# Altium PCB ctrl_board.PcbDoc
Units mm, origin at the board's own origin, x right, y up, seen from the top; angles counter-clockwise.
Board outline 140 x 82 mm, 2 copper layers (Top Layer, Bottom Layer); 140 components, 74 nets, 391 pads, 0 vias.
Unrouted connection lines stored in the file: 255.
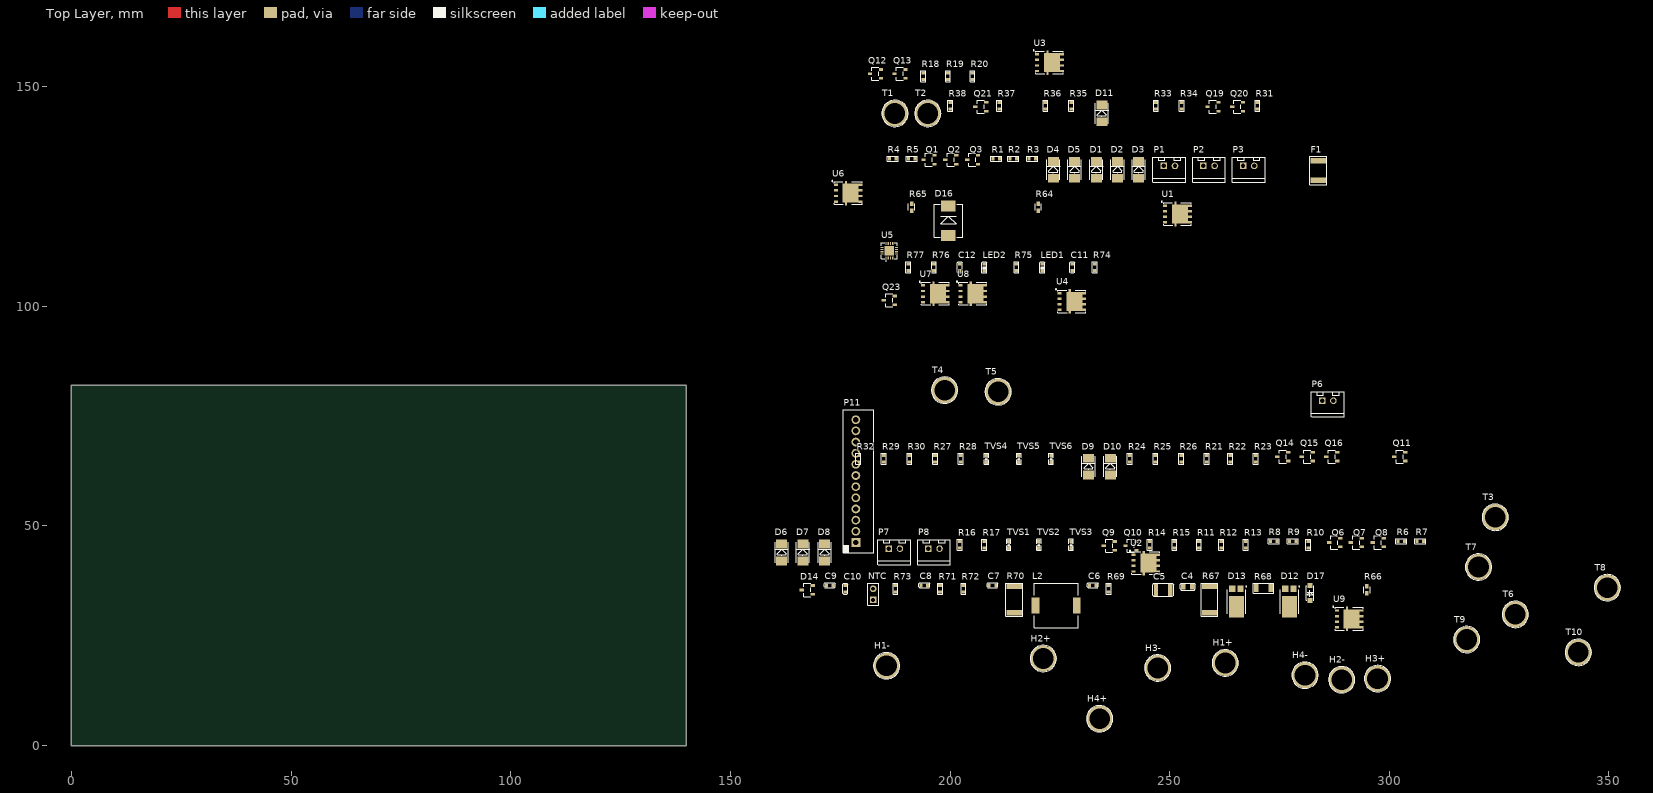
[diagram p0: Top Layer view]
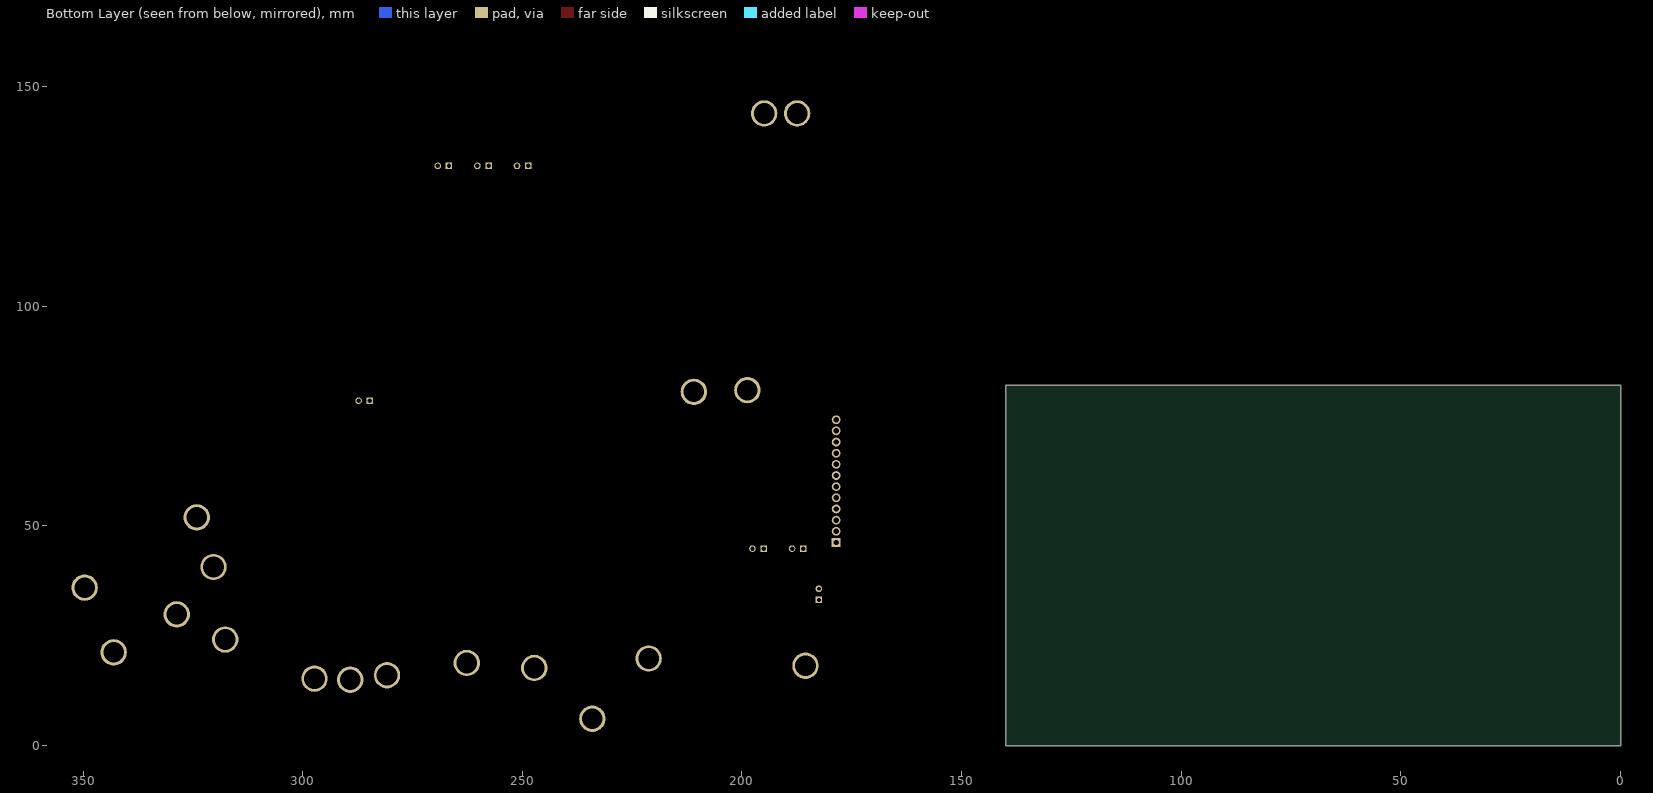
[diagram p1: Bottom Layer view, seen from below]

## Layer stack, top to bottom
Top Solder: solder mask 0.0102, Solder Resist, Dk 3.5
Top Layer: signal copper 0.0356
Dielectric1: dielectric 0.32, FR-4, Dk 4.8
Bottom Layer: signal copper 0.0356
Bottom Solder: solder mask 0.0102, Solder Resist, Dk 3.5

## Board outline
0,0 140,0 140,82 0,82

## Design rules (kind name [scope] priority, off if disabled: settings)
Clearance [All] p1: gap=0.254 ignorepadtopadclearanceinfootprint=FALSE except(0: Arc-Hole Track-Hole SMDPad-Hole THPad-Hole Via-Hole Fill-Hole Poly-Hole Region-Hole Text-Hole)
PolygonConnect [All] p1: connectstyle=Relief reliefconductorwidth=0.254 reliefentries=4 polygonreliefangle="90 Angle" airgapwidth=0.254
RoutingVias [All] p1: holewidth=0.711 width=1.27 viastyle="Through Hole" minholewidth=0.711 minwidth=1.27 maxholewidth=0.711 maxwidth=1.27
SilkToSolderMaskClearance SilkscreenOverComponentPads [IsPad] p1: minsilkscreentomaskgap=0.254 clearancetoexposedcopper=TRUE
SolderMaskExpansion [All] p1: expansion=0.102 istentingtop=FALSE
Width [All] p1: maxlimit=0.254 minlimit=0.254 preferedwidth=0.254
29 further rules are at their usual default settings.

## Classes and differential pairs
component class charger: C4 C5 C6 C7 C8 C9 C10 C11 C12 D12 D13 D14 D16 D17 L2 LED1 LED2 NTC Q23 R64 R65 R66 R67 R68 R69 R70 R71 R72 R73 R74 R75 R76 R77 T3 T4 T5 T6 T7 T8 T9 T10 U1 U2 U4 U5
component class drv: D1 D2 D3 D4 D5 D6 D7 D8 D9 D10 D11 F1 H1+ H1- H2+ H2- H3+ H3- H4+ H4- P1 P2 P3 P6 P7 P8 P11 Q1 Q2 Q3 Q6 Q7 Q8 Q9 Q10 Q11 Q12 Q13 Q14 Q15 Q16 Q19 Q20 Q21 R1 R2 R3 R4 R5 R6 R7 R8 R9 R10 R11 R12 R13 R14 R15 R16 R17 R18 R19 R20 R21 R22 R23 R24 R25 R26 R27 R28 R29 R30 R31 R32 R33 R34 R35 R36 R37 R38 T1 T2 TVS1 TVS2 TVS3 TVS4 TVS5 TVS6 U3 U6 U7 U8 U9

## Components (designator, comment, footprint, x,y, rotation, side; value= is the part's Value field where it differs from the comment)
C4 "1uF/25V" 0805C 253.111,36.195 r0 top
C5 "2.2uF/25V" 1210C 246.888,35.433 r0 top
C6 "1uF/25V" 0603C 231.775,36.449 r0 top
C7 "1uF/25V" 0603C 208.915,36.449 r0 top
C8 "10uF/25V" 0603C 193.421,36.449 r0 top
C9 "22pF" 0603C 171.831,36.449 r0 top
C10 "10uF/25V" 0603C 176.149,34.925 r90 top
C11 "0.1uF/25V" 0603C 227.838,108.077 r90 top
C12 "0.1uF/25V" 0603C 202.184,108.077 r90 top
D1 "1N4007" DO-214-AC 233.299,131.064 r90 top
D2 "1N4007" DO-214-AC 238.125,131.064 r90 top
D3 "1N4007" DO-214-AC 242.951,131.064 r90 top
D4 "1N4007" DO-214-AC 223.52,131.064 r90 top
D5 "1N4007" DO-214-AC 228.346,131.064 r90 top
D6 "1N4007" DO-214-AC 161.671,43.942 r90 top
D7 "1N4007" DO-214-AC 166.497,43.942 r90 top
D8 "1N4007" DO-214-AC 171.45,43.942 r90 top
D9 "1N4007" DO-214-AC 231.521,63.5 r90 top
D10 "1N4007" DO-214-AC 236.474,63.5 r90 top
D11 "1N4007" DO-214-AC 234.569,143.891 r90 top
D12 "PDS1040-13" POWERDI-5_L5.4-W4.0-LS6.5-RD 277.241,33.655 r90 top
D13 "PDS1040-13" POWERDI-5_L5.4-W4.0-LS6.5-RD 265.176,33.655 r90 top
D14 "bat54c" sot23-3 168.783,34.417 r0 top
D16 "SMCJ28CA" SMC 199.644,116.078 r90 top
D17 "BZT52C27" sod123 281.94,33.02 r90 top value=BZT52C12S-7-F
F1 "2A" 1812-F 283.845,128.651 r90 top
H1+ "12V" FIX-4.5 262.636,18.796 r0 top
H1- "12V" FIX-4.5 185.547,18.161 r0 top
H2+ "12V" FIX-4.5 221.234,19.812 r0 top
H2- "12V" FIX-4.5 289.179,14.986 r0 top
H3+ "12V" FIX-4.5 297.307,15.24 r0 top
H3- "12V" FIX-4.5 247.269,17.653 r0 top
H4+ "12V" FIX-4.5 234.061,6.096 r0 top
H4- "12V" FIX-4.5 280.797,16.002 r0 top
L2 "SMMS1040-3R3M" MSS1038 219.456,31.877 r0 top
LED1 "5V" 0603LED 220.98,108.077 r90 top
LED2 "5V" 0603LED 207.772,108.077 r90 top
NTC "Header 2" HDR1X2 182.499,33.147 r90 top
P1 "SIP-2" SIP-2A 249.936,131.953 r0 top
P2 "SIP-2" SIP-2A 258.953,131.953 r0 top
P3 "SIP-2" SIP-2A 267.97,131.953 r0 top
P6 "SIP-2" SIP-2A 286.004,78.486 r0 top
P7 "SIP-2" SIP-2A 187.325,44.831 r0 top
P8 "SIP-2" SIP-2A 196.342,44.831 r0 top
P11 "Header 11" 12*2.54MMZ 175.641,48.133 r90 top
Q1 "BC817-16" SOT23-3 196.469,132.334 r0 top
Q2 "BC817-16" SOT23-3 201.422,132.334 r0 top
Q3 "BC817-16" SOT23-3 206.375,132.334 r0 top
Q6 "AO3400" SOT23-3 288.798,45.212 r0 top
Q7 "AO3400" SOT23-3 293.751,45.212 r0 top
Q8 "AO3400" SOT23-3 298.704,45.212 r0 top
Q9 "S8050" SOT23-3 237.49,44.45 r0 top
Q10 "S8050" SOT23-3 242.443,44.45 r0 top
Q11 "BC817-16" SOT23-3 303.657,64.77 r0 top
Q12 "BC817-16" SOT23-3 184.277,151.892 r0 top
Q13 "BC817-16" SOT23-3 189.865,151.892 r0 top
Q14 "AO3400" SOT23-3 276.987,64.77 r0 top
Q15 "AO3400" SOT23-3 282.575,64.77 r0 top
Q16 "AO3400" SOT23-3 288.163,64.77 r0 top
Q19 "S8050" SOT23-3 261.112,144.399 r0 top
Q20 "S8050" SOT23-3 266.7,144.399 r0 top
Q21 "S8050" SOT23-3 208.28,144.399 r0 top
Q23 "MMBT4403-7-F" SOT23-3 187.452,100.33 r0 top
R1 "100R" 0603R 209.804,133.604 r0 top
R2 "100R" 0603R 213.614,133.604 r0 top
R3 "100R" 0603R 217.932,133.604 r0 top
R4 "10K" 0603R 186.182,133.604 r0 top
R5 "10K" 0603R 190.5,133.604 r0 top
R6 "100" 0603R 302.006,46.482 r0 top
R7 "100" 0603R 306.324,46.482 r0 top
R8 "10K" 0603R 272.923,46.482 r0 top
R9 "10K" 0603R 277.241,46.482 r0 top
R10 "10K" 0603R 281.559,44.958 r90 top
R11 "10K" 0603R 256.667,44.958 r90 top
R12 "10K" 0603R 261.747,44.958 r90 top
R13 "10K" 0603R 267.335,44.958 r90 top
R14 "1K" 0603R 245.491,44.958 r90 top
R15 "1K" 0603R 251.079,44.958 r90 top
R16 "1K" 0603R 202.184,44.958 r90 top
R17 "1K" 0603R 207.772,44.958 r90 top
R18 "100R" 0603R 193.929,151.638 r90 top
R19 "100R" 0603R 199.517,151.638 r90 top
R20 "100R" 0603R 205.105,151.638 r90 top
R21 "10K" 0603R 258.445,64.516 r90 top
R22 "10K" 0603R 263.779,64.516 r90 top
R23 "10K" 0603R 269.621,64.516 r90 top
R24 "10K" 0603R 240.919,64.516 r90 top
R25 "10K" 0603R 246.761,64.516 r90 top
R26 "10K" 0603R 252.603,64.516 r90 top
R27 "10K" 0603R 196.596,64.516 r90 top
R28 "10K" 0603R 202.438,64.516 r90 top
R29 "100" 0603R 184.912,64.516 r90 top
R30 "100" 0603R 190.754,64.516 r90 top
R31 "1K" 0603R 270.002,144.907 r90 top
R32 "1K" 0603R 179.07,64.516 r90 top
R33 "1K" 0603R 246.888,144.907 r90 top
R34 "1K" 0603R 252.73,144.907 r90 top
R35 "10K" 0603R 227.584,144.907 r90 top
R36 "100" 0603R 221.742,144.907 r90 top
R37 "1K" 0603R 211.201,144.907 r90 top
R38 "10K" 0603R 200.025,144.907 r90 top
R64 "100k" RESC1608X055N_0603 220.091,122.555 r90 top
R65 "1k/1%" RESC1608X055N_0603 191.262,122.555 r90 top
R66 "10k" RESC1608X055N_0603 294.894,35.433 r90 top
R67 "2/1W" 2512R 259.08,30.226 r90 top
R68 "10/1/4W" 1206R 269.748,35.814 r0 top
R69 "215k" 0603R 236.093,34.925 r90 top
R70 "15mR" 2512R 214.63,30.226 r90 top
R71 "5.23K" 0603R 197.739,34.925 r90 top
R72 "11.8K" 0603R 203.073,34.925 r90 top
R73 "698K" 0603R 187.579,34.925 r90 top
R74 "30.1K" 0603R 232.918,108.077 r90 top
R75 "1k/1%" 0603R 215.138,108.077 r90 top
R76 "100K" 0603R 196.342,108.077 r90 top
R77 "1k/1%" 0603R 190.5,108.077 r90 top
T1 "12V" FIX-4.5 187.452,143.891 r0 top
T2 "12V-" FIX-4.5 194.945,143.891 r0 top
T3 "12V" FIX-4.5 324.104,51.943 r0 top
T4 "12V" FIX-4.5 198.755,80.899 r0 top
T5 "GND" FIX-4.5 210.947,80.518 r0 top
T6 "GND" FIX-4.5 328.676,29.845 r0 top
T7 "12V" FIX-4.5 320.294,40.64 r0 top
T8 "GND" FIX-4.5 349.631,35.941 r0 top
T9 "12V" FIX-4.5 317.627,24.13 r0 top
T10 "GND" FIX-4.5 343.027,21.209 r0 top
TVS1 "ESD5Z5.0CT1G" SOD-523 213.36,45.72 r90 top
TVS2 "ESD5Z5.0CT1G" SOD-523 220.218,45.72 r90 top
TVS3 "ESD5Z5.0CT1G" SOD-523 227.584,45.72 r90 top
TVS4 "ESD5Z5.0CT1G" SOD-523 208.28,65.278 r90 top
TVS5 "ESD5Z5.0CT1G" SOD-523 215.646,65.278 r90 top
TVS6 "ESD5Z5.0CT1G" SOD-523 223.012,65.278 r90 top
U1 "Si7997DP" "PowerPAK SO-8" 248.031,123.571 r0 top
U2 "Si7288DP" "PowerPAK SO-8" 240.812,44.099 r0 top
U3 "Si7997DP" "PowerPAK SO-8" 218.887,158.023 r0 top
U4 "Si7288DP" "PowerPAK SO-8" 223.967,103.667 r0 top
U5 "BQ24650RVAR" VQFN-16_L3.6-W3.6-P0.50-BL-EP 186.182,112.649 r0 top
U6 "Si7997DP" "PowerPAK SO-8" 173.04,128.305 r0 top
U7 "Si7997DP" "PowerPAK SO-8" 192.913,105.41 r0 top
U8 "Si7997DP" "PowerPAK SO-8" 201.422,105.41 r0 top
U9 "Si7997DP" "PowerPAK SO-8" 287.086,31.404 r0 top

## Footprints (in the part's own frame and the unit in brackets; to place one, negate y for a bottom-side part, rotate by r counter-clockwise, add the part's x,y. Pads: shape width x height; smd on the part's side, far side on the other; paste and mask are expansions set on the pad)
12*2.54MMZ [mm]
  rect 2x2 hole 1.2: 1(-1.905,-2.921)
  round 2 hole 1.2: 2(0.635,-2.921) 3(3.175,-2.921) 4(5.715,-2.921) 5(8.255,-2.921) 6(10.795,-2.921) 7(13.335,-2.921) 8(15.875,-2.921) 9(18.415,-2.921) 10(20.955,-2.921) 11(23.495,-2.921) 12(26.035,-2.921)
  silkscreen extent -4.23,-7 28.35,-0.02
0603C [mm]
  rect 0.7x0.85 smd: 1(0,0) 2(1.5,0)
  silkscreen extent -0.5,-0.55 2,0.55
0603LED [mm]
  rect 0.7x0.85 smd: 1(0,0) 2(1.5,0)
  silkscreen extent -0.5,-0.55 2,0.55
0603R [mm]
  rect 0.7x0.85 smd: 1(0,0) 2(1.5,0)
  silkscreen extent -0.5,-0.55 2,0.55
0805C [mm]
  rect 1x1.3 smd: 1(0,0) 2(2,0)
  silkscreen extent -0.7,-0.8 2.7,0.8
1206R [mm]
  rect 1x1.8 smd: 1(0,0) 2(3.25,0)
  silkscreen extent -0.7,-1.1 3.95,1.1
1210C [mm]
  rect 1x2.7 smd: 1(0,0) 2(3.25,0)
  silkscreen extent -0.8,-1.5 4.05,1.5
1812-F [mm]
  rect 1.3x3.5 smd: 1(0,0) 2(4.5,0)
  silkscreen extent -1,-1.95 5.5,1.95
2512R [mm]
  rect 1.2x3.5 smd: 1(0,0) 2(6,0)
  silkscreen extent -0.75,-1.9 6.75,1.9
DO-214-AC [mm]
  rect 2x2.5 smd: 1(-1.915,0) 2(1.915,0)
  silkscreen extent -2.3,-1.52 2.3,1.5, body extent -2.3,-1.35 2.3,1.35, height 2.4
FIX-4.5 [mm]
  round 6 hole 4.7: 1(0,0)
  silkscreen extent -3,-3 3,3
HDR1X2 [mm] "Connector; Header; 2 Position"
  rect 1.5x1.5 hole 0.9: 1(0,0)
  round 1.5 hole 0.9: 2(2.54,0)
  silkscreen extent -1.27,-1.27 3.81,1.27
MSS1038 [mm]
  rect 1.78x3.56 smd: 1(0,0) 2(9.4,0)
  silkscreen extent -0.3,-5.11 9.7,5.09
POWERDI-5_L5.4-W4.0-LS6.5-RD [mm]
  rect 1.4x1.4 smd: 1(2.032,-0.92) 2(2.032,0.92)
  rect 4.9x3.4 smd: 3(-2.032,0)
  silkscreen extent -3.7,-2.37 2.67,2.1
"PowerPAK SO-8" [mm]
  rect 0.9x0.54 smd: 1(0.95,-0.67) 2(0.95,-1.94) 3(0.95,-3.21) 4(0.95,-4.48) 5(6.548,-4.48) 6(6.548,-3.21) 7(6.548,-1.94) 8(6.548,-0.67)
  rect 0.5x1.6 smd: 5(3.3,-4.575) 8(3.3,-0.575)
  rect 3.66x2.5 smd: 5(4.325,-3.495)
  rect 3.66x2 smd: 8(4.325,-1.401)
  silkscreen extent 0.03,-5.12 6.93,0.33
RESC1608X055N_0603 [mil] "Chip Resistor, 0603"
  round 10 on Mech3: 0(0,0)
  rect 40x30 smd: 1(-30.98,0) 2(30.98,0)
  silkscreen extent -30,-29 30,29, body extent -31,-16 31,16, height 22
SIP-2A [mm]
  rect 1.5x1.5 hole 1: 1(-1.27,0)
  round 1.5 hole 1: 2(1.27,0)
  silkscreen extent -3.75,-3.68 3.75,2.02, body extent -3.7,-3.81 3.7,2.29, height 7.5
SMC [mm]
  rect 2.5x3.3 smd: 1(0,0) 2(6.75,0)
  silkscreen extent -0.35,-3.25 7.15,3.25
sod123 [mm]
  rect 1.1x1.2 smd: 1(0,0) 2(3.385,0)
  silkscreen extent 0,-0.9 3.3,0.9
SOD-523 [mil]
  rect 31.5x30 smd: 1(-30,0) 2(30,0)
  silkscreen extent -51,-20 51,20, body extent -31,-16 31,16, height 26
sot23-3 [mm]
  rect 1x0.6 smd: 1(0,0) 2(0,2) 3(-2.5,1)
  silkscreen extent -2.1,-0.5 -0.5,2.5
SOT23-3 [mm]
  rect 1x0.6 smd: 1(0,0) 2(0,2) 3(-2.5,1)
  silkscreen extent -2.1,-0.5 -0.5,2.5
VQFN-16_L3.6-W3.6-P0.50-BL-EP [mm]
  rect 0.28x0.665 smd: 1(-0.75,-1.658) 2(-0.25,-1.658) 3(0.25,-1.658) 4(0.75,-1.658) 9(0.75,1.658) 10(0.25,1.658) 11(-0.25,1.658) 12(-0.75,1.658)
  rect 0.665x0.28 smd: 5(1.658,-0.75) 6(1.658,-0.25) 7(1.658,0.25) 8(1.658,0.75) 13(-1.658,0.75) 14(-1.658,0.25) 15(-1.658,-0.25) 16(-1.658,-0.75)
  rect 2.14x2.14 smd: 17(0,0)
  silkscreen extent -1.83,-2.36 1.83,1.83

## Part data
C4 C5 C6 C7 C8 C9 C10 C11 C12: library part CAP, "Capacitor"
D1 D2 D3 D4 D5 D6 D7 D8 D9 D10 D11: library part DIODE2, "贴片二极管"
D12 D13: Average Rectified Current (Io)=10A, Forward Voltage (Vf@If)=510mV@10A, JLCPCB Part Class="Extended Part", LCSC Part Name="电压:40V 电流:10A", Manufacturer=DIODES(美台), Reverse Voltage (Vr)=40V, Add into BOM=yes, Convert to PCB=yes, Datasheet=https://atta.szlcsc.com/upload/public/pdf/source/20170427/1493286399327.pdf, Device=PDS1040-13, Manufacturer Part=PDS1040-13, Supplier=LCSC, Supplier Footprint=Power-DI-5, Supplier Part=C110512, Symbol=PDS1040-13
D14: library part PDS1040-13, Average Rectified Current (Io)=10A, Forward Voltage (Vf@If)=510mV@10A, JLCPCB Part Class="Extended Part", LCSC Part Name="电压:40V 电流:10A", Manufacturer=DIODES(美台), Reverse Voltage (Vr)=40V, Add into BOM=yes, Convert to PCB=yes, Datasheet=https://atta.szlcsc.com/upload/public/pdf/source/20170427/1493286399327.pdf, Device=PDS1040-13, Manufacturer Part=PDS1040-13, Supplier=LCSC, Supplier Footprint=Power-DI-5, Supplier Part=C110512, Symbol=PDS1040-13
D16: library part "DIODE S", "Schottky Diode"
D17: library part BZT52C12S-7-F, Minimum Operating Temperature=-65C, Package / Case=SOD-323, Package Description="2-Pin Surface Mount Device, Body 1.7 x 1.3 mm", Package Reference=SOD323-2, Pd - Power Dissipation=200mW, Voltage Temperature Coefficient=0.25mV/C, Voltage Tolerance=5%, Vz - Zener Voltage=12V, Zener Current=5mA, Mounting Style=SMD/SMT, Mounting Technology=SurfaceMount, Package URL=http://www.vishay.com/docs/71192/71192.pdf, Packaging=Reel, Product Category=ZenerDiodes, RoHS=True, Series=BZT52C12, Termination Style=SMD/SMT, Unit Weight=0.000173oz, Width=1.4mm, Zz - Zener Impedance=40Ohms
F1: library part "Fuse 1", "Fuse", LatestRevisionDate=17-Jul-2002, LatestRevisionNote="Re-released for DXP Platform.", PackageDescription="Thru-Hole; 2 Leads", PackageReference=PIN-W2/E2.8, Published=8-Jun-2000, Publisher="Altium Limited"
H1+ H1- H2+ H2- H3+ H3- H4+ H4- T1 T2 T3 T4 T5 T6 T7 T8 T9 T10: library part TP
L2: library part INDUCTOR
LED1 LED2: library part LED
NTC P1 P2 P3 P6 P7 P8: "XH2.54 2P 立贴"
  NTC: LatestRevisionDate=17-Jul-2002, LatestRevisionNote="Re-released for DXP Platform.", Publisher="Altium Limited"
P11: "Header, 11-Pin", LatestRevisionDate=17-Jul-2002, LatestRevisionNote="Re-released for DXP Platform.", Publisher="Altium Limited"
Q1 Q2 Q3 Q11 Q12 Q13: library part NPN-1, "三极管"
Q6 Q7 Q8 Q14 Q15 Q16: library part "MOSFET N", "MOSFET N"
Q9 Q10 Q19 Q20 Q21: library part NPN, "NPN Bipolar Transistor", Code_JEDEC=TO-226-AA, LatestRevisionDate=17-Jul-2002, LatestRevisionNote="Re-released for DXP Platform.", PackageReference=TO-226, Published=8-Jun-2000, Publisher="Altium Limited"
Q23: library part OEM_Diodes_MMBT4403
R1 R2 R3 R6 R7 R8 R9 R10 R11 R12 R13 R18 R19 R20 R21 R22 R23 R24 R25 R26 R29 R30 R36: library part RES-SOP, "贴片电阻 5%"
R4 R5 R14 R15 R16 R17 R27 R28 R31 R32 R33 R34 R35 R37 R38 R67 R68 R69 R70 R71 R72 R73 R74 R76: library part Res1, "Resistor", LatestRevisionDate=17-Jul-2002, LatestRevisionNote="Re-released for DXP Platform.", PackageReference=AXIAL-0.3, Published=8-Jun-2000, Publisher="Altium Limited"
R64: library part Resistor_0603, Package=0603, PartNumber=RC0603FR-0716K9L, Power Rating=[power], TempCo=[tempco], Tolerance=tol, SupplierDescription="RES SMD 16.9K OHM 1% 1/10W 0603"
R65 R66: library part Resistor_0603, Package=0603, PartNumber=RC0603FR-071KL, Power Rating=[power], TempCo=[tempco], Tolerance=tol, SupplierDescription="RES SMD 1K OHM 1% 1/10W 0603"
R75 R77: library part R
TVS1 TVS2 TVS3 TVS4 TVS5 TVS6: library part TVS-1, "TVS"
U1 U3 U6 U7 U8 U9: "Sia430DJ"
U2 U4: library part Si7997DP, "Sia430DJ"
U5: JLCPCB Part Class="Extended Part", Manufacturer=TI(德州仪器), Add into BOM=yes, Convert to PCB=yes, Datasheet=https://www.ti.com/cn/lit/gpn/bq24650, Device=BQ24650RVAR, LCSC Part Name=BQ24650RVAR, Manufacturer Part=BQ24650RVAR, Supplier=LCSC, Supplier Footprint=VQFN-16-EP(3.6x3.6), Supplier Part=C53712, Symbol=BQ24650RVAR

## Nets (pads, with @x,y where several pads share a name; then routed paths per layer and width w, separated by ;. In a path a pad name is that pad's centre, name@x,y a point inside that pad or via, vN(x,y) a via of type N, cw(c..) or ccw(c..) an arc to the next point about the centre after c; other vN are vias at no path point)
AIR_12V: T1.1 U3.5 U3.6 U3.7 U3.8
AIR_PWR: P11.7 R37.2 R38.1
BAT_CHARGE: C8.2 C9.2 C10.2 C12.1 P11.2 R70.2 R73.1 T3.1 T7.1 T9.1 U5.9
COOL1: P11.11 R1.2 R2.2
COOL2: P11.10 R3.2 R18.2
COOL3: P11.9 R19.2
COOL4: P11.8 R20.2
GND: C4.2 C5.2 C6.1 C7.2 C8.1 C10.1 D16.1 D17.1 NTC.1 P11.1 Q6.2 Q7.2 Q8.2 Q9.2 Q10.2 Q14.2 Q15.2 Q16.2 Q19.2 Q20.2 Q21.2 R8.1 R9.1 R10.1 R11.2 R12.2 R13.2 R16.2 R17.2 R21.1 R22.1 R23.1 R24.2 R25.2 R26.2 R33.2 R34.2 R38.2 R66.2 R72.2 R74.2 R76.2 T2.1 T5.1 T6.1 T8.1 T10.1 TVS1.1 TVS2.1 TVS3.1 TVS4.1 TVS5.1 TVS6.1 U4.1 U4.3 U5.11 U5.17 U6.5 U6.6 U6.7 U6.8 U7.5 U7.6 U7.7 U7.8 U8.5 U8.6 U8.7 U8.8 U9.5 U9.6 U9.7 U9.8
HEATER_1: P11.6 R14.2 R16.1
HEATER_2: P11.5 R31.2 R33.1
HEATER_3: P11.4 R15.2 R17.1
HEATER_4: P11.3 R32.2 R34.1
NetC4_1: C4.1 R68.2 U5.1
NetC5_1: C5.1 R67.2
NetC6_2: C6.2 R71.1 U5.6 U5.7
NetC7_1: C7.1 D14.1 D14.2 U5.12
NetC9_1: C9.1 R73.2 R76.1 U5.8
NetC11_1: C11.1 U5.14
NetC11_2: C11.2 D14.3 U5.16
NetC12_2: C12.2 L2.2 R70.1 U5.10
NetD1_1: D1.1 P1.2 Q6.3
NetD1_2: D1.2 P1.1
NetD2_1: D2.1 P2.2 Q7.3
NetD3_1: D3.1 P3.2 Q8.3
NetD4_1: D4.1 R6.2 U7.2 U7.4
NetD4_2: D4.2 Q9.3 R4.1 R6.1
NetD5_1: D5.1 R7.2 U8.2 U8.4
NetD5_2: D5.2 Q10.3 R5.1 R7.1
NetD6_1: D6.1 P6.2 Q14.3
NetD7_1: D7.1 P7.2 Q15.3
NetD8_1: D8.1 P8.2 Q16.3
NetD9_1: D9.1 R29.2 U6.2 U6.4
NetD9_2: D9.2 Q19.3 R27.1 R29.1
NetD10_1: D10.1 R30.2 U9.2 U9.4
NetD10_2: D10.2 Q20.3 R28.1 R30.1
NetD11_1: D11.1 R36.2 U3.2 U3.4
NetD11_2: D11.2 Q21.3 R35.1 R36.1
NetD12_3: D12.3 D13.3 R68.1 U2.5 U2.6 U2.7 U2.8
NetD17_2: D17.2 R64.1 R65.1
NetF1_1: F1.1 H1+.1
NetH1-_1: H1-.1 U7.1 U7.3
NetH2-_1: H2-.1 U6.1 U6.3
NetH3-_1: H3-.1 U8.1 U8.3
NetH4-_1: H4-.1 U9.1 U9.3
NetL2_1: L2.1 U2.1 U2.3 U4.5 U4.6 U4.7 U4.8
NetLED1_1: LED1.1 R75.1
NetLED1_2: LED1.2 U5.3
NetLED2_1: LED2.1 R77.1
NetNTC_2: NTC.2 R71.2 R74.1 U5.4
NetQ1_1: Q1.1 R1.1 R8.2
NetQ1_2: Q1.2 Q6.1 R11.1 TVS1.2
NetQ2_1: Q2.1 R2.1 R9.2
NetQ2_2: Q2.2 Q7.1 R12.1 TVS2.2
NetQ3_1: Q3.1 R3.1 R10.2
NetQ3_2: Q3.2 Q8.1 R13.1 TVS3.2
NetQ9_1: Q9.1 R14.1
NetQ10_1: Q10.1 R15.1
NetQ11_1: Q11.1 R18.1 R21.2
NetQ11_2: Q11.2 Q14.1 R24.1 TVS4.2
NetQ12_1: Q12.1 R19.1 R22.2
NetQ12_2: Q12.2 Q15.1 R25.1 TVS5.2
NetQ13_1: Q13.1 R20.1 R23.2
NetQ13_2: Q13.2 Q16.1 R26.1 TVS6.2
NetQ19_1: Q19.1 R31.1
NetQ20_1: Q20.1 R32.1
NetQ21_1: Q21.1 R37.1
NetQ23_1: Q23.1 R65.2
NetQ23_3: Q23.3 R66.1 U1.2 U1.4
NetR69_2: R69.2 R72.1 U5.2
NetU2_2: U2.2 U2.4 U5.15
NetU4_2: U4.2 U4.4 U5.13
VCC_HEATER: D2.2 D3.2 D6.2 D7.2 D8.2 F1.2 H2+.1 H3+.1 H4+.1 P2.1 P3.1 P6.1 P7.1 P8.1 Q1.3 Q2.3 Q3.3 Q11.3 Q12.3 Q13.3 R4.2 R5.2 R27.2 R28.2 R35.2 U3.1 U3.3
VIN_Adatper: R75.2 R77.2 T4.1 U1.1 U1.3
VIN_Adatper_OUT: D12.1 D12.2 D13.1 D13.2 D16.2 Q23.2 R64.2 R67.1 R69.1 U1.5 U1.6 U1.7 U1.8
pads on no net: LED2.2 P11.12 R64.0 R65.0 R66.0 U5.5

## Silkscreen, mask and mechanical layers (free items; w line width, h text height)
Mechanical 1:
  the board outline again, w0.254